# EAGLE board PR9022 (EAGLE 6.6.0)
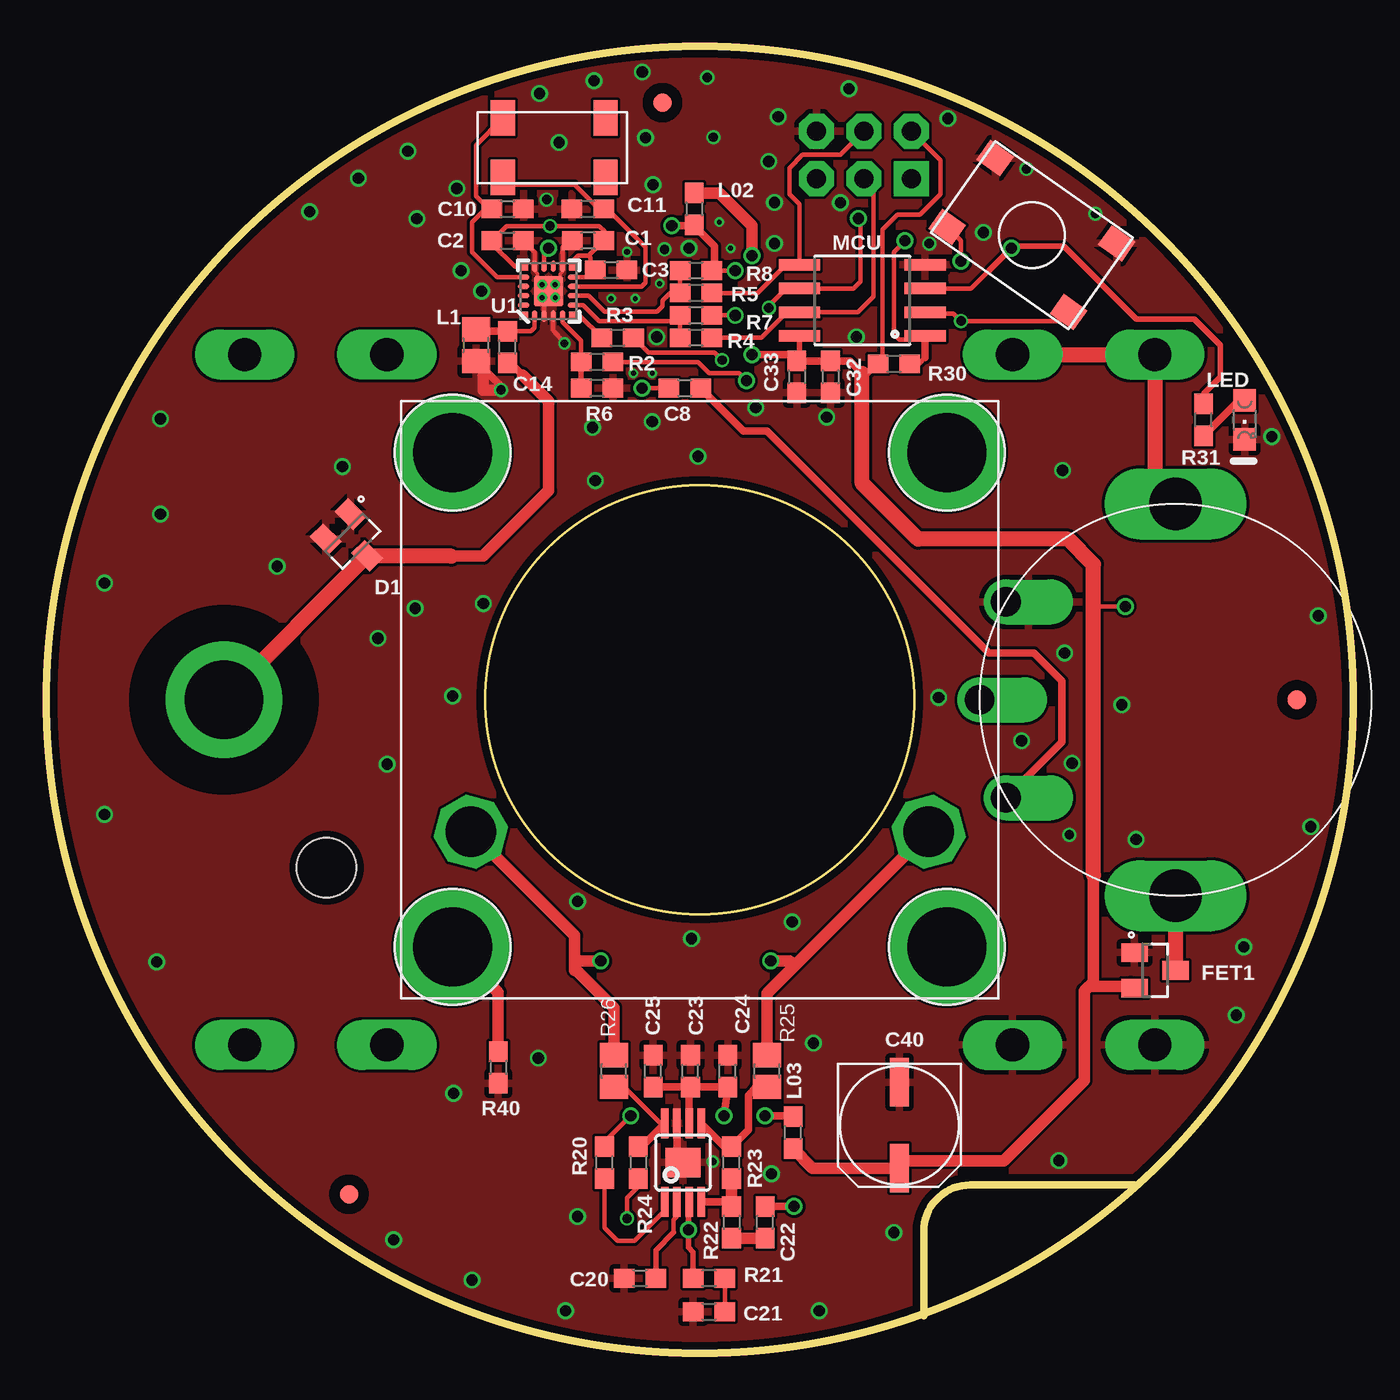
[diagram p0: board, top side]
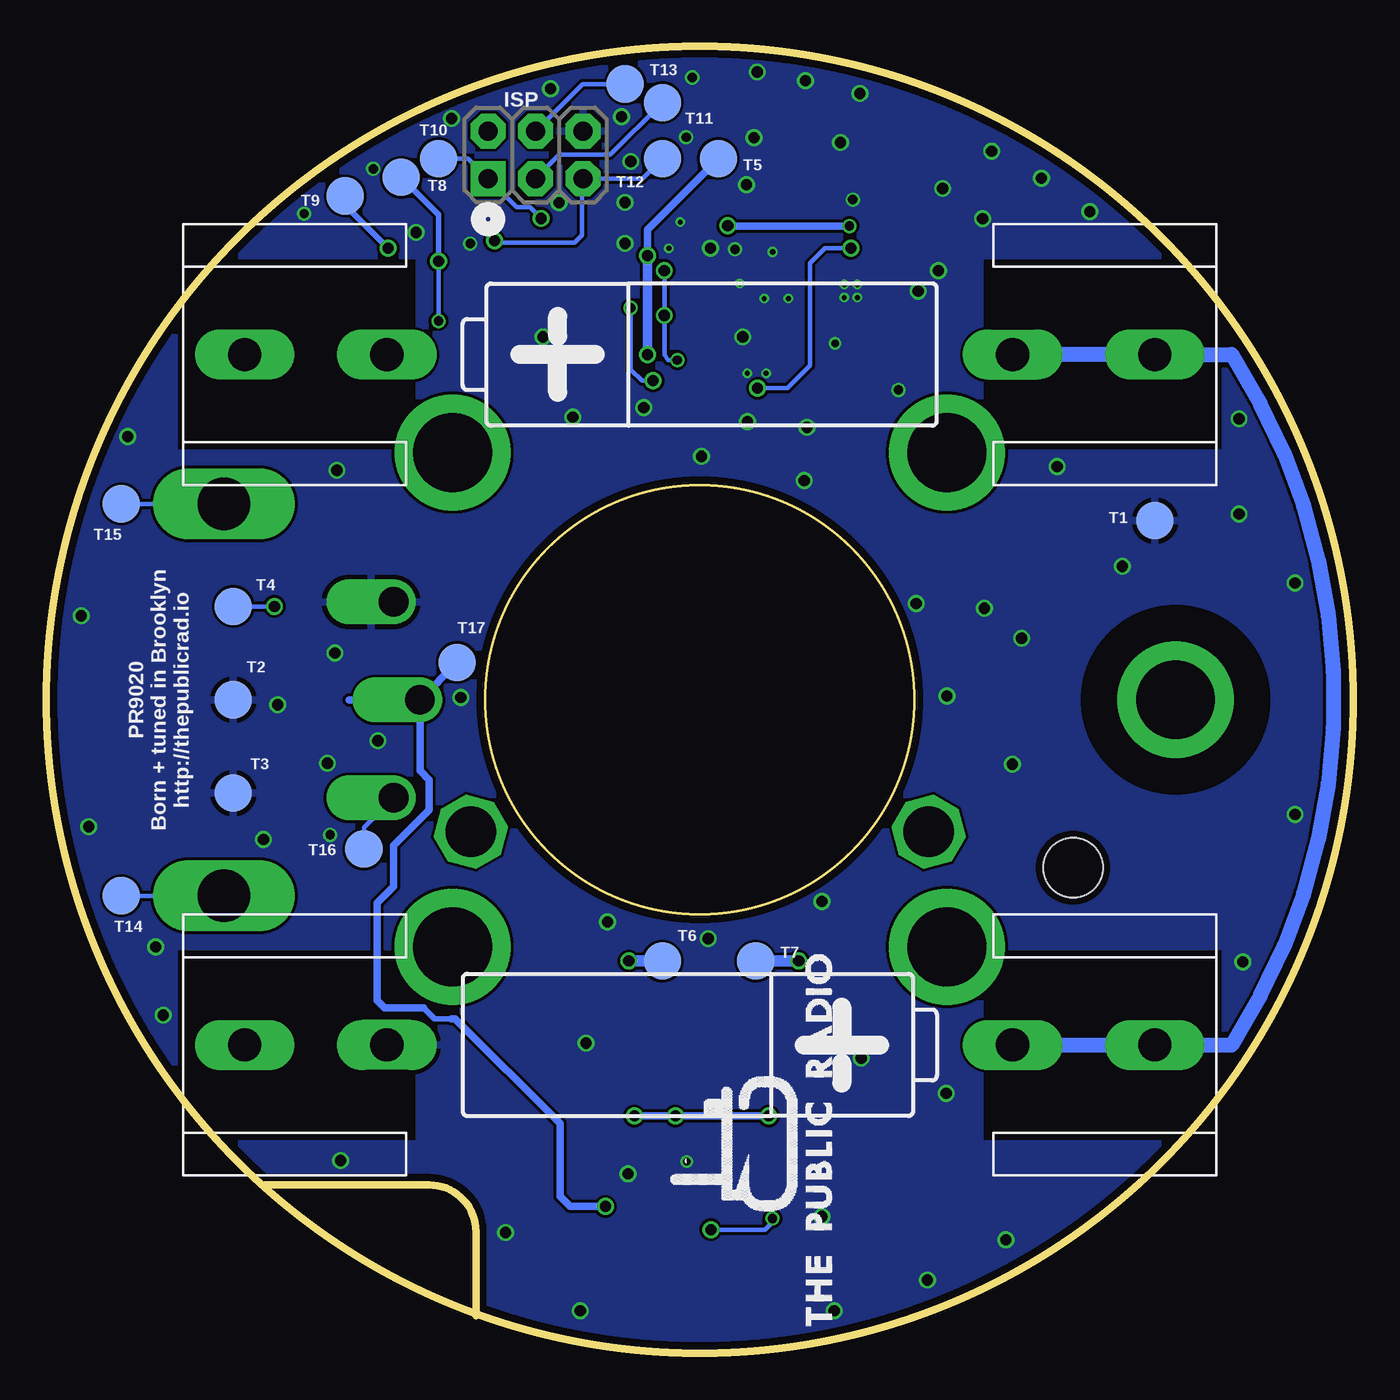
[diagram p1: board, bottom side, seen from below]

Size 70 x 70 mm. Coordinates in mm from the lower left corner, seen from the top.
Outline: 47,2 47,6.5 arc-90 49.5,9 58.3,9
Outline: circle at 35,35 radius 35
Copper layers (1*16): Top 0.0356mm / dielectric 1.5011mm / Bottom 0.0356mm
Design rules "LaenPCBOrder *": minimum track width 6mil, minimum drill 13mil, track to track 6mil, track to pad 6mil, pad to pad 6mil, via to via 6mil, smd to smd 6mil, copper to edge 15mil, drill to drill 6mil, minimum pad ring 7mil, minimum via ring 5mil, stop-mask expansion 3mil, vias tented up to drill 0mil, thermal gap 10mil
Net classes: 1 antenna: clearance 1.27 mm
Holes 3.2 mm at 15,26
tRestrict: area 26.1,56.1 to 27.7,57.7; 8 lines

## Footprints (pad centres in the part's own frame; a part is rotated, then mirrored left to right if it is on the bottom)
8-MSOP = smd 0.4 x 1.6: 1 -0.975,-2.1; 2 -0.325,-2.1; 3 0.325,-2.1; 4 0.975,-2.1; 5 0.975,2.1; 6 0.325,2.1; 7 -0.325,2.1; 8 -0.975,2.1 | smd 1.89 x 1.57: 9 0,0
PEM_M3 = drill 4.22 pad 6.22: P$2 0,0
0603_CPL = smd 1.1 x 1: 1 -0.85,0; 2 0.85,0
NICHICON_UD_63 = smd 1 x 2.6: P$1 0,2.3; P$2 0,-2.3
SOT23_CPL = smd 1.4 x 1: 1 -1.1,0.95; 2 -1.1,-0.95; 3 1.1,0
2X3-NS = drill 1.016 pad 1.88 square: 1 -2.54,-1.27 | drill 1.016 pad 1.88 octagon: 2 -2.54,1.27; 3 0,-1.27; 4 0,1.27; 5 2.54,-1.27; 6 2.54,1.27
BK92_AA_BATT = drill 1.778 long: NEG -24.384,0; NEG@2 -16.764,0; POS 16.764,0; POS@2 24.384,0
0805_ADAFRUIT = smd 1.3 x 1.5: 1 -0.85,0; 2 0.85,0
CHIPLED_0805 = smd 1.2 x 1.2: A 0,-1.05; C 0,1.05
FIDUCIAL_1MM = smd 1 x 1: 1 0,0
8-SOIC = smd 0.61 x 2.21: 1 -1.905,-3.378; 2 -0.635,-3.378; 3 0.635,-3.378; 4 1.905,-3.378; 5 1.905,3.353; 6 0.635,3.353; 7 -0.635,3.353; 8 -1.905,3.353
RV170SF_SW_POT = drill 1.6 offset: GND -5.25,-9.09; SIGNAL 5.25,-9.09; WIPER 0,-10.5 | drill 2.8 long: SW_IN 10.5,0; SW_OUT -10.5,0
PR2024_SPKR_PLACE = drill 2.7 octagon: P$5 -12.26,-7.08; P$6 12.26,-7.08
C&K_PTS645_SMT = smd 1.55 x 1.3: P$1 -3.975,2.25; P$2 3.975,2.25; P$3 -3.975,-2.25; P$4 3.975,-2.25
TP20R = smd 2 x 2: TP 0,0
SI470X_20_QFN = smd 0.34 x 0.34: 1 -1.275,1.265; 6 -1.265,-1.265; 11 1.265,-1.265; 16 1.265,1.265 | smd 0.61 x 0.28: 2 -1.335,0.75; 3 -1.335,0.25; 4 -1.335,-0.25; 5 -1.335,-0.75; 12 1.335,-0.75; 13 1.335,-0.25; 14 1.335,0.25; 15 1.335,0.75 | smd 0.28 x 0.61: 7 -0.75,-1.335; 8 -0.25,-1.335; 9 0.25,-1.335; 10 0.75,-1.335; 17 0.75,1.335; 18 0.25,1.335; 19 -0.25,1.335; 20 -0.75,1.335 | smd 1.6 x 1.6: 21 0,0
PEM_M3_NOKEEPAWAY = drill 4.22 pad 6.22: P$2 0,0
4-SOJ = smd 1.3 x 1.9: P$1 -2.75,-1.6; P$2 2.75,-1.6; P$3 2.75,1.6; P$4 -2.75,1.6

## Placement (x,y rotation side)
AMP  [8-MSOP]  34.1,10.2 0 top
ANT_MOUNT  DNP  [PEM_M3]  9.5,35 0 top
C1  22nF  [0603_CPL]  29.01,59.6 180 top
C2  22nF  [0603_CPL]  24.7,59.6 0 top
C3  .1uF  [0603_CPL]  30.24,58.03 0 top
C8  1uF  [0603_CPL]  34.2,51.7 0 top
C10  22pF  [0603_CPL]  24.7,61.3 0 top
C11  22pF  [0603_CPL]  29,61.3 180 top
C14  47pF  [0603_CPL]  24.7,53.9 90 top
C20  .22uF  [0603_CPL]  31.8,4 0 top
C21  .22uF  [0603_CPL]  35.5,2.2 0 top
C22  .22uF  [0603_CPL]  38.5,7 90 top
C23  .1uF  [0603_CPL]  34.5,15.1 90 top
C24  1uF  [0603_CPL]  36.5,15.1 90 top
C25  10uF  [0603_CPL]  32.5,15.1 90 top
C32  10uF  [0603_CPL]  42,52.3 270 top
C33  .1uF  [0603_CPL]  40.2,52.3 270 top
C40  220uF  [NICHICON_UD_63]  45.7,12.2 180 top
D1  [SOT23_CPL]  16.4,43.5 315 top
FET1  [SOT23_CPL]  59.4,20.5 0 top
ISP  [2X3-NS]  43.8,64.2 0 bottom
JP5  [BK92_AA_BATT]  35,53.5 180 bottom
JP6  [BK92_AA_BATT]  35,16.5 0 bottom
L1  180nH  [0805_ADAFRUIT]  23,54 270 top
L02  2.2k@100MHz  [0603_CPL]  34.7,61.3 270 top
L03  2.2k@100MHz  [0603_CPL]  40,11.8 90 top
LED  [CHIPLED_0805]  64.2,50 180 top
MARK1  [FIDUCIAL_1MM]  16.2,8.5 0 top
MARK2  [FIDUCIAL_1MM]  33,67 0 top
MARK3  [FIDUCIAL_1MM]  67,35 0 top
MCU  [8-SOIC]  43.7,56.4 90 top
R1  [RV170SF_SW_POT]  60.5,35 270 top
R2  330  [0603_CPL]  29.5,53.1 180 top
R3  4.7K  [0603_CPL]  30.6,54.4 0 top
R4  330  [0603_CPL]  34.8,54.4 180 top
R5  330  [0603_CPL]  34.8,56.8 180 top
R6  10K  [0603_CPL]  29.5,51.7 180 top
R7  4.7K  [0603_CPL]  34.8,55.6 0 top
R8  4.7K  [0603_CPL]  34.8,58 0 top
R20  10K  [0603_CPL]  29.9,10.2 90 top
R21  12K  [0603_CPL]  35.5,4 180 top
R22  12K  [0603_CPL]  36.7,7 270 top
R23  100K  [0603_CPL]  36.7,10.2 90 top
R24  100K  [0603_CPL]  31.7,10.2 270 top
R25  0 ohm  [0805_ADAFRUIT]  38.6,15.1 90 top
R26  0 ohm  [0805_ADAFRUIT]  30.4,15.1 90 top
R30  10K  [0603_CPL]  45.4,53 0 top
R31  1K  [0603_CPL]  62,50 90 top
R40  DNP  [0603_CPL]  24.2,15.3 270 top
SPKR_PLACE  DNP  [PR2024_SPKR_PLACE]  35,35 0 top
SW1  [C&K_PTS645_SMT]  52.8,59.9 325 top
T1  [TP20R]  10.6,44.6 0 bottom
T2  [TP20R]  60,35 0 bottom
T3  [TP20R]  60,30 0 bottom
T4  [TP20R]  60,40 0 bottom
T5  [TP20R]  34,64 0 bottom
T6  [TP20R]  37,21 0 bottom
T7  [TP20R]  32,21 0 bottom
T8  [TP20R]  51,63 0 bottom
T9  [TP20R]  54,62 0 bottom
T10  [TP20R]  49,64 0 bottom
T11  [TP20R]  37,67 0 bottom
T12  [TP20R]  37,64 0 bottom
T13  [TP20R]  39,68 0 bottom
T14  [TP20R]  66,24.5 0 bottom
T15  [TP20R]  66,45.5 0 bottom
T16  [TP20R]  53,27 0 bottom
T17  [TP20R]  48,37 0 bottom
U1  [SI470X_20_QFN]  26.9,56.9 90 top
U$1  [PR_LOGO]  33.5,11.2 90 bottom
U$2  PEM_M3_NOPIN  [PEM_M3_NOKEEPAWAY]  21.76,48.24 0 top
U$3  PEM_M3_NOPIN  [PEM_M3_NOKEEPAWAY]  48.24,48.24 0 top
U$4  PEM_M3_NOPIN  [PEM_M3_NOKEEPAWAY]  48.24,21.76 0 top
U$5  PEM_M3_W/PIN  [PEM_M3_NOKEEPAWAY]  21.76,21.76 0 top
X1  [4-SOJ]  27.2,64.58 0 top

## Library data of the parts
AMP = PR_Parts_Library; MFG_PN: TPA6203A1DGNR
ANT_MOUNT SPKR_PLACE U$1-U$5 = PR_Parts_Library
C1 C2 = PR_Parts_Library; MFG_PN: CL10B223KB8NNNC; TOL: 10%; VOLTAGE: 16V
C3 C23 C33 = PR_Parts_Library; MFG_PN: CL10B104KB8SFNC; TOL: 10%; VOLTAGE: 16V
C8 C24 = PR_Parts_Library; MFG_PN: CL10B105KP8NNNC; TOL: 10%; VOLTAGE: 10V
C10 C11 = PR_Parts_Library; MFG_PN: C1608C0G1H220J080AA; TOL: 5%; VOLTAGE: 50V
C14 = PR_Parts_Library; MFG_PN: CL10C470JB8NCNC; TOL: 5%; VOLTAGE: 50V
C20-C22 = PR_Parts_Library; MFG_PN: C1608X7R1C224K080AC; TOL: 10%; VOLTAGE: 16V
C25 C32 = PR_Parts_Library; MFG_PN: CL10A106MQ8NNNC; TOL: 20%; VOLTAGE: 6.3V
C40 = PR_Parts_Library; MFG_PN: UUD1C221MCL1GS; TOL: 20%; VOLTAGE: 16V
D1 = PR_Parts_Library; MFG_PN: BAV99,215
FET1 = PR_Parts_Library; MFG_PN: AO3435
ISP = PR_Parts_Library; MFG_PN: M20-9980346
JP5 JP6 = PR_Parts_Library; MFG_PN: 2 of BK92 - supplied by CL Labs
L1 = PR_Parts_Library; CURRENT: 400mA; DCR: 640m; MFG_PN: AISC-0805-R18J-T; TOL: 5%
L02 L03 = PR_Parts_Library; CURRENT: 150mA; DCR: 2.3; MFG_PN: HZ0603A222R-10
LED = adafruit; MFG_PN: LY R976-PS-36
MARK1-MARK3 T1-T17 = PR_Parts_Library; MFG_PN: DNP
MCU = PR_Parts_Library; MFG_PN: ATTINY45-20SUR
R1 = PR_Parts_Library; MFG_PN: RV170SF-43-20F-A10K - supplied by CL Labs
R2 R4 R5 = PR_Parts_Library; MFG_PN: MCR03ERTJ331; POWER: 1/10W; TOL: 5%
R3 R7 R8 = PR_Parts_Library; MFG_PN: ERJ-3EKF4701V; POWER: 1/10W; TOL: 1%
R6 R20 R30 = PR_Parts_Library; MFG_PN: ERJ-3GEYJ103V; POWER: 1/10W; TOL: 5%
R21 R22 = PR_Parts_Library; MFG_PN: RC0603FR-0712KL; POWER: 1/10W; TOL: 1%
R23 R24 = PR_Parts_Library; MFG_PN: ERJ-3EKF1003V; POWER: 1/10W; TOL: 1%
R25 R26 = PR_Parts_Library; MFG_PN: ERJ-6GEY0R00V
R31 = PR_Parts_Library; MFG_PN: ERJ-3EKF1001V; POWER: 1/10W; TOL: 1%
R40 = PR_Parts_Library; MFG_PN: ERJ-3GEY0R00V
SW1 = PR_Parts_Library; MFG_PN: PTS645SM43SMTR92 LFS
U1 = PR_Parts_Library; MFG_PN: Si4702 C19 GM - supplied by CL Labs
X1 = PR_Parts_Library; MFG_PN: ABS25-32.768KHZ-T

## Nets
3.3V: C1.1 C2.1 C3.1 L02.2 R3.2 R7.2 R8.2 U1.10 U1.11 U1.16
!RST: ISP.1 MCU.6 R2.1 T10.TP
!RST-L: R2.2 R6.2 U1.5
!SEN-L: R3.1 U1.6
A_IN: C8.2 R1.SIGNAL T16.TP
A_OUT: C22.2 R1.WIPER T17.TP
ANT [antenna]: ANT_MOUNT.P$2 C14.1 D1.3
GND: AMP.7 AMP.9 C1.2 C2.2 C3.2 C10.2 C11.2 C20.1 C21.1 C23.2 C24.2 C25.2 C32.2 C33.2 C40.P$2 D1.1 D1.2 FET1.1 ISP.6 JP6.NEG JP6.NEG@2 L1.2 LED.C MCU.4 R1.GND R6.1 R40.2 SW1.P$1 SW1.P$2 T1.TP T2.TP T3.TP U1.3 U1.4 U1.12 U1.15 U1.21
GPIO1: U1.19
GPIO2: U1.18
LED/PB4: MCU.3 R31.2 T9.TP
N$1: C11.1 U1.9 X1.P$1
N$2: AMP.6 C23.1 C24.1 C25.1 L03.2 R20.2
N$3: C22.1 R22.2
N$4: AMP.5 R23.2 R25.1
N$5: AMP.3 R21.2 R24.2
N$6: R40.1 U$5.P$2
N$7: LED.A R31.1
N$9: C8.1 U1.14
N$10: C10.1 U1.17 X1.P$4
N$11: AMP.8 R24.1 R26.1
N$12: AMP.2 C20.2
N$13: JP5.NEG JP5.NEG@2 JP6.POS JP6.POS@2
N$14: AMP.4 R22.1 R23.1
N$16 [antenna]: C14.2 L1.1 U1.2
N$20: AMP.1 R20.1
N$23: C21.2 R21.1
RESET: ISP.5 MCU.1 R30.2 T12.TP
SCLK: ISP.3 MCU.7 R4.1 T11.TP
SCLK-L: R4.2 R7.1 U1.7
SDIO: ISP.4 MCU.5 R5.1 T13.TP
SDIO-L: R5.2 R8.1 U1.8
SPK_OUT+: R25.2 SPKR_PLACE.P$6 T6.TP
SPK_OUT-: R26.2 SPKR_PLACE.P$5 T7.TP
SW: MCU.2 SW1.P$3 SW1.P$4 T8.TP
SW_IN: FET1.3 R1.SW_IN T14.TP
SW_OUT: JP5.POS JP5.POS@2 R1.SW_OUT T15.TP
VCC: C32.1 C33.1 C40.P$1 FET1.2 ISP.2 L02.1 L03.1 MCU.8 R30.1 T4.TP T5.TP

## Tracks (layer width: path | path; a pad name or v marks a point on that pad's centre or on a via)
3.3V  (via drill 0.5, 0.6)
  Top 0.254: R7.2 v36.9,55.6 | 25.23,58.16 U1.16 25.6,58.2 25.1,58.2 23.85,59.45 C2.1 24.64,60.39 v26.98,60.39 29.61,60.39 29.9,60.1 29.9,59.64 C1.1 | v36.2,53.2 35.8,53.6 32.25,53.6 R3.2 | U1.10 28.35,57.65 | R8.2 v36.9,58 | U1.11 28.16,58.48 28.47,58.79 29.05,58.79 | 29.05,58.79 C1.1 | 29.8,59.66 C1.1 | U1.10 29.07,57.65 C3.1 | U1.10 28.93,57.65 29.16,57.88 29.16,58.68 29.05,58.79
  Top 0.406: 34.7,60.4 35.8,59.3 35.8,58.05 | v33.5,60.4 34.65,60.4 L02.2
  Top 0.61: L02.2 34.7,60.4 | 35.8,58.05 R8.2
  Bottom 0.254: v36.9,58 v36.9,55.6 36.9,53.5 36.7,53.2 v36.2,53.2
  Bottom 0.406: v26.98,60.39 v33.49,60.39 v33.5,60.4
!RST  (via drill 0.5, 0.6)
  Top 0.254: v43.5,60.8 43.6,60.7 43.6,57.4 43.23,57.03 MCU.6 40.28,57.1 39.7,57.1 38.73,56.13 38.73,56.03 v38.7,56 | R2.1 34.9,53.1 35.5,52.5 37.1,52.5 v37.5,52.1
  Bottom 0.254: T10.TP 47.41,64 ISP.1 44.81,61.4 44.1,61.4 v43.5,60.8 | v38.7,56 38.7,52.7 38.1,52.1 v37.5,52.1
!RST-L
  Top 0.254: U1.5 27.65,55.25 28.65,54.25 R2.2
  Top 0.305: R6.2 R2.2
!SEN-L
  Top 0.254: R3.1 28.52,55.63 U1.6
A_IN
  Top 0.406: R1.SIGNAL 54.4,32.74 54.4,36 52.9,37.5 50.5,37.5 38.6,49.4 37.35,49.4 C8.2
  Bottom 0.254: T16.TP 53,28.16 R1.SIGNAL
A_OUT  (via drill 0.6)
  Top 0.406: C22.2 v40.05,7.85
  Bottom 0.305: 48.3,17.9 49.2,17.9 49.8,18.5
  Bottom 0.406: 53.8,35 R1.WIPER | T17.TP R1.WIPER | 48.3,17.9 48.1,17.9 42.5,12.3 42.5,8.4 41.95,7.85 v40.05,7.85 | 49.8,18.5 51.9,18.5 52.3,18.9 52.3,24.1 51.4,25 51.4,27.2 49.5,29.1 49.5,30.7 50,31.2 R1.WIPER
ANT
  Top 0.406: 25.5,52.4 24.85,53.05 C14.1
  Top 0.61: 21.7,42.7 23.4,42.7 26.9,46.2 26.9,51 25.5,52.4
  Top 0.813: ANT_MOUNT.P$2 9.5,35.04 D1.3 17.2,42.7 21.7,42.7
GND  (via drill 0.25, 0.25 pad 0.1, 0.3, 0.4, 0.5, 0.6)
  Top 0.2: U1.12 27.65,57.95 27.5,57.8 27.5,57.5 v27.25,57.25 | 26.34,57.46 v26.55,57.25 26.31,57.49 26.31,57.84 26.15,58 U1.15 | 27.15,56.44 v27.26,56.55
  Top 0.254: v27.25,57.25 U1.21 | v26.55,57.25 v26.55,57.24 26.57,57.23 | U1.15 26.15,59 C2.2 | U1.12 27.65,59.25 28,59.6 C1.2 | U1.4 27.15,54.8 v27.75,54.1 | U1.3 26.65,56.45 v26.55,56.55
  Top 0.305: AMP.7 33.77,10.53 AMP.9
  Top 0.406: AMP.7 33.77,10.12 33.8,10.1 | L1.2 24.35,51.8 v24.35,51.6
  Top 0.61: v24.35,51.6 23.4,51.6 23.4,52.35
  other vias: 35.4,68.35 32.45,49.9 65.65,49.1 29.4,46.75 26.41,67.49 18.59,6.06 21.8,13.9 39.95,23.1 64.15,21.75 52.25,32.8 19.36,64.39 47.3,59.45 43,67.75 48.3,66.15 26.35,15.8 41.8,50.15 56.2,61.05 39,59.45 23.3,56.9 42.54,61.64 35.73,65.15 39,61.65 21.98,62.4 19.84,60.78 50.2,60.04 14.1,61.15 6.1,50.05 3.1,41.25 3.1,28.85 27.8,2.25 54.25,10.3 63.75,18.1 67.75,28.2 68.15,39.5 29.25,49.6 19.75,39.9 23.4,40.15 21.75,35.2 34.9,48.05 16.7,62.95 18.25,31.55 5.9,20.95 22.21,58 38,50.65 17.75,38.3 12.35,42.15 15.85,47.5 32.1,65.12 27.46,64.87 26.8,61.81 31.1,59 32.49,62.61 34.42,59.2 32.7,54.45 38.84,9.6 41.1,16.6 47.8,35.12 54.55,37.5 54.95,31.6 54.45,47.3 39.2,66.25 38.7,63.85 6.1,44.95 30.25,56.5 31.55,56.5 32.85,57.3 36.65,59.2 36.05,60.6 32.45,52.5 22.8,3.9 31.45,52.5 52.5,63.45 33.11,59.14 35.7,10.25 29.34,68.17 31.92,68.64 54.81,27.76 58.38,27.52 57.62,34.73 43.4,54.45 41.4,2.25 45.4,6.45 34.55,22.2 28.45,24.2 28.45,7.3
  pour Bottom: 0,35 arc90 35,0 arc90 70,35 arc90 35,70 arc90
  pour Top: 0,35 arc90 35,0 arc90 70,35 arc90 35,70 arc90
LED/PB4  (via drill 0.6)
  Top 0.254: MCU.3 49.53,57.03 50.5,58
  Top 0.305: 50.5,58 v51.7,59.2 51.8,59.3 54.5,59.3 58.4,55.4 61.5,55.4 62.9,54 62.9,52.3 62,51.4 R31.2
  Bottom 0.305: T9.TP 54,61.5 v51.7,59.2
N$1
  Top 0.254: X1.P$1 24.75,62.6 28.3,62.6 29.6,61.3 C11.1 | C11.1 29.7,61.3 | C11.1 30.05,61.3 32.1,59.25 32.1,57.36 31.89,57.15 U1.9
N$2  (via drill 0.6)
  Top 0.254: R20.2 29.9,11.3 v31.3,12.7
  Top 0.406: C23.1 C24.1 v36.3,12.7 | C23.1 34.42,14.25 AMP.6 | v38.5,12.7 39.75,12.7 L03.2 | C25.1 C23.1
  Bottom 0.406: v31.3,12.7 v36.3,12.7 v38.5,12.7
N$3
  Top 0.61: R22.2 C22.1
N$4
  Top 0.406: AMP.5 36.33,11.05 R23.2 37.6,11.95 37.6,13.8 38.05,14.25 38,14.3 R25.1
N$5  (via drill 0.5, 0.6)
  Top 0.254: R24.2 31.7,8.9 31.1,8.3 v31.1,7.2
  Top 0.305: AMP.3 34.4,8.07 v34.4,6.6 34.4,5.65 34.65,5.4 R21.2
  Bottom 0.254: v31.1,7.2 31.1,7 31.5,6.6 v34.4,6.6
N$6
  Top 0.61: R40.1 24.2,19.32 U$5.P$2
N$7
  Top 0.406: R31.1 63.89,51.04 LED.A
N$9  (via drill 0.6)
  Top 0.254: U1.14 26.65,58.95 v26.9,59.2 | v31.9,51.7 C8.1
  Bottom 0.254: v31.9,51.7 30.3,51.7 29.1,52.9 29.1,58.4 28.3,59.2 v26.9,59.2
N$10
  Top 0.254: U1.17 24.15,57.65 22.8,59 22.8,60.6 23.5,61.3 C10.1 | C10.1 23.8,61.2 | X1.P$4 23,64.73 23,62 23.7,61.3 C10.1
N$11
  Top 0.254: AMP.8 32.9,12.3 31.1,14.1 30.55,14.1 R26.1
  Top 0.406: R24.1 31.88,11.05 AMP.8 33.12,12.32
N$12
  Top 0.254: 33.7,8.03 AMP.2 33.77,7.3 33.6,7.13 33.6,6.45
  Top 0.305: C20.2 32.65,5.5 33.6,6.45
N$13
  Bottom 0.813: JP6.POS JP6.POS@2 6.5,16.5 arc-66 6.5,53.5 JP5.NEG JP5.NEG@2
N$14
  Top 0.406: AMP.4 36.45,8.1 R22.1
  Top 0.61: R22.1 R23.1
N$16
  Top 0.254: C14.2 25.95,54.75 26.15,54.95 U1.2
  Top 0.406: L1.1 23.1,54.75 C14.2
N$20
  Top 0.254: AMP.1 33.1,8.07 33.1,7.6 31.5,6 30.6,6 29.9,6.7 R20.1 30.2,9.15
N$21
  pour Bottom: 
N$23
  Top 0.254: C21.2 R21.1
RESET  (via drill 0.6)
  Top 0.254: MCU.1 47.07,54.3 45.7,54.3 45.4,54.6 45.4,59 v46,59.6 | R30.2 46.75,53 47.08,53.33
  Top 0.406: 47.08,53.33 MCU.1
  Bottom 0.254: T12.TP 38.07,62.93 ISP.5 41.3,62.89 41.3,59.9 41.7,59.5 45.9,59.5 v46,59.6
SCLK
  Top 0.254: ISP.3 44.3,62.43 44.3,56.6 43.47,55.77 MCU.7 40.31,55.8 39.7,55.8 38.3,54.4 R4.1
  Bottom 0.254: ISP.3 42.53,64.2 39.8,64.2 T11.TP
SCLK-L
  Top 0.254: R4.2 R7.1 33.65,55.3 29.6,55.3 28.75,56.15 U1.7
SDIO
  Top 0.254: ISP.4 42.53,64.2 40.5,64.2 39.8,63.5 39.8,62.1 40.35,61.55 MCU.5 39.6,58.3 38.1,56.8 R5.1
  Bottom 0.254: T13.TP 41.27,68 ISP.4
SDIO-L
  Top 0.254: R5.2 R8.1 | 33.85,57 R5.2 | R5.2 33.4,56.8 33,56.4 33,56.1 32.7,55.8 29.9,55.8 29.05,56.65 U1.8
SPK_OUT+  (via drill 0.6)
  Top 0.61: R25.2 38.6,19.26 40.07,20.73 | v38.8,21 39.8,21 40.07,20.73 | SPKR_PLACE.P$6 40.07,20.73
  Bottom 0.61: T6.TP v38.8,21
SPK_OUT-  (via drill 0.6)
  Top 0.61: 28.3,20.5 28.3,20.6 | 28.3,20.6 28.3,21 | 28.3,21 28.3,22.36 SPKR_PLACE.P$5 | R26.2 30.4,18.5 28.3,20.6 | v29.7,21 28.3,21
  Bottom 0.61: T7.TP v29.7,21
SW  (via drill 0.5, 0.6)
  Top 0.254: SW1.P$4 54.29,55.3 v49,55.3 48.6,55.7 47.14,55.7 MCU.2 | v49,58.5 49,59.59 SW1.P$3
  Bottom 0.254: v49,55.3 v49,58.5
  Bottom 0.305: v49,58.5 49,61 T8.TP
SW_IN
  Top 0.813: FET1.3 R1.SW_IN
  Bottom 0.254: T14.TP R1.SW_IN
SW_OUT
  Top 0.813: JP5.POS JP5.POS@2 59.38,46.62 R1.SW_OUT
  Bottom 0.254: T15.TP R1.SW_OUT
VCC  (via drill 0.6)
  Top 0.254: 44.8,52.75 44.8,52.9 44.8,60.2 45.6,61 46.8,61 47.9,62.1 47.9,63.91 ISP.2 | v57.8,40 56.1,40
  Top 0.305: 43.7,52.5 44.05,52.5 R30.1 44.7,53 44.8,52.9 | MCU.8 40.35,53.3 C33.1 39.85,53.49
  Top 0.406: 43.7,52.5 43.05,53.15 C32.1 C33.1 | 39.85,53.49 v37.8,53.49
  Top 0.61: L02.1 36.05,62.15 37.8,60.4 v37.8,58.8 | 40.05,11 L03.1 | 58.1,19.65 55.85,19.65 | 55.85,19.65 55.6,19.4 55.6,14.6 51.3,10.3 46.1,10.3 C40.P$1 41.05,9.9 L03.1 | 55.85,19.65 56.1,19.9 56.1,25.6 | 40.05,10.9 L03.1
  Top 0.813: 56.1,25.6 56.1,40 56.1,42.25 54.75,43.6 46.7,43.6 43.7,46.6 43.7,52.5 | 58.1,19.65 FET1.2
  Bottom 0.254: T4.TP v57.8,40
  Bottom 0.406: T5.TP 37.8,60.2 v37.8,58.8
  Bottom 0.5: v37.8,53.5 v37.8,58.8
  Bottom 0.61: v37.8,53.49 v37.8,53.5

## Text on the board
bNames: PR9020 / Born + tuned in Brooklyn / http://thepublicrad.io